# Altium PCB LOC_BUI.pcbdoc
Units mm, origin at the board's own origin, x right, y up, seen from the top; angles counter-clockwise.
Board outline 102.36 x 75.57 mm, 2 copper layers (Top Layer, Bottom Layer); 35 components, 31 nets, 145 pads, 0 vias.
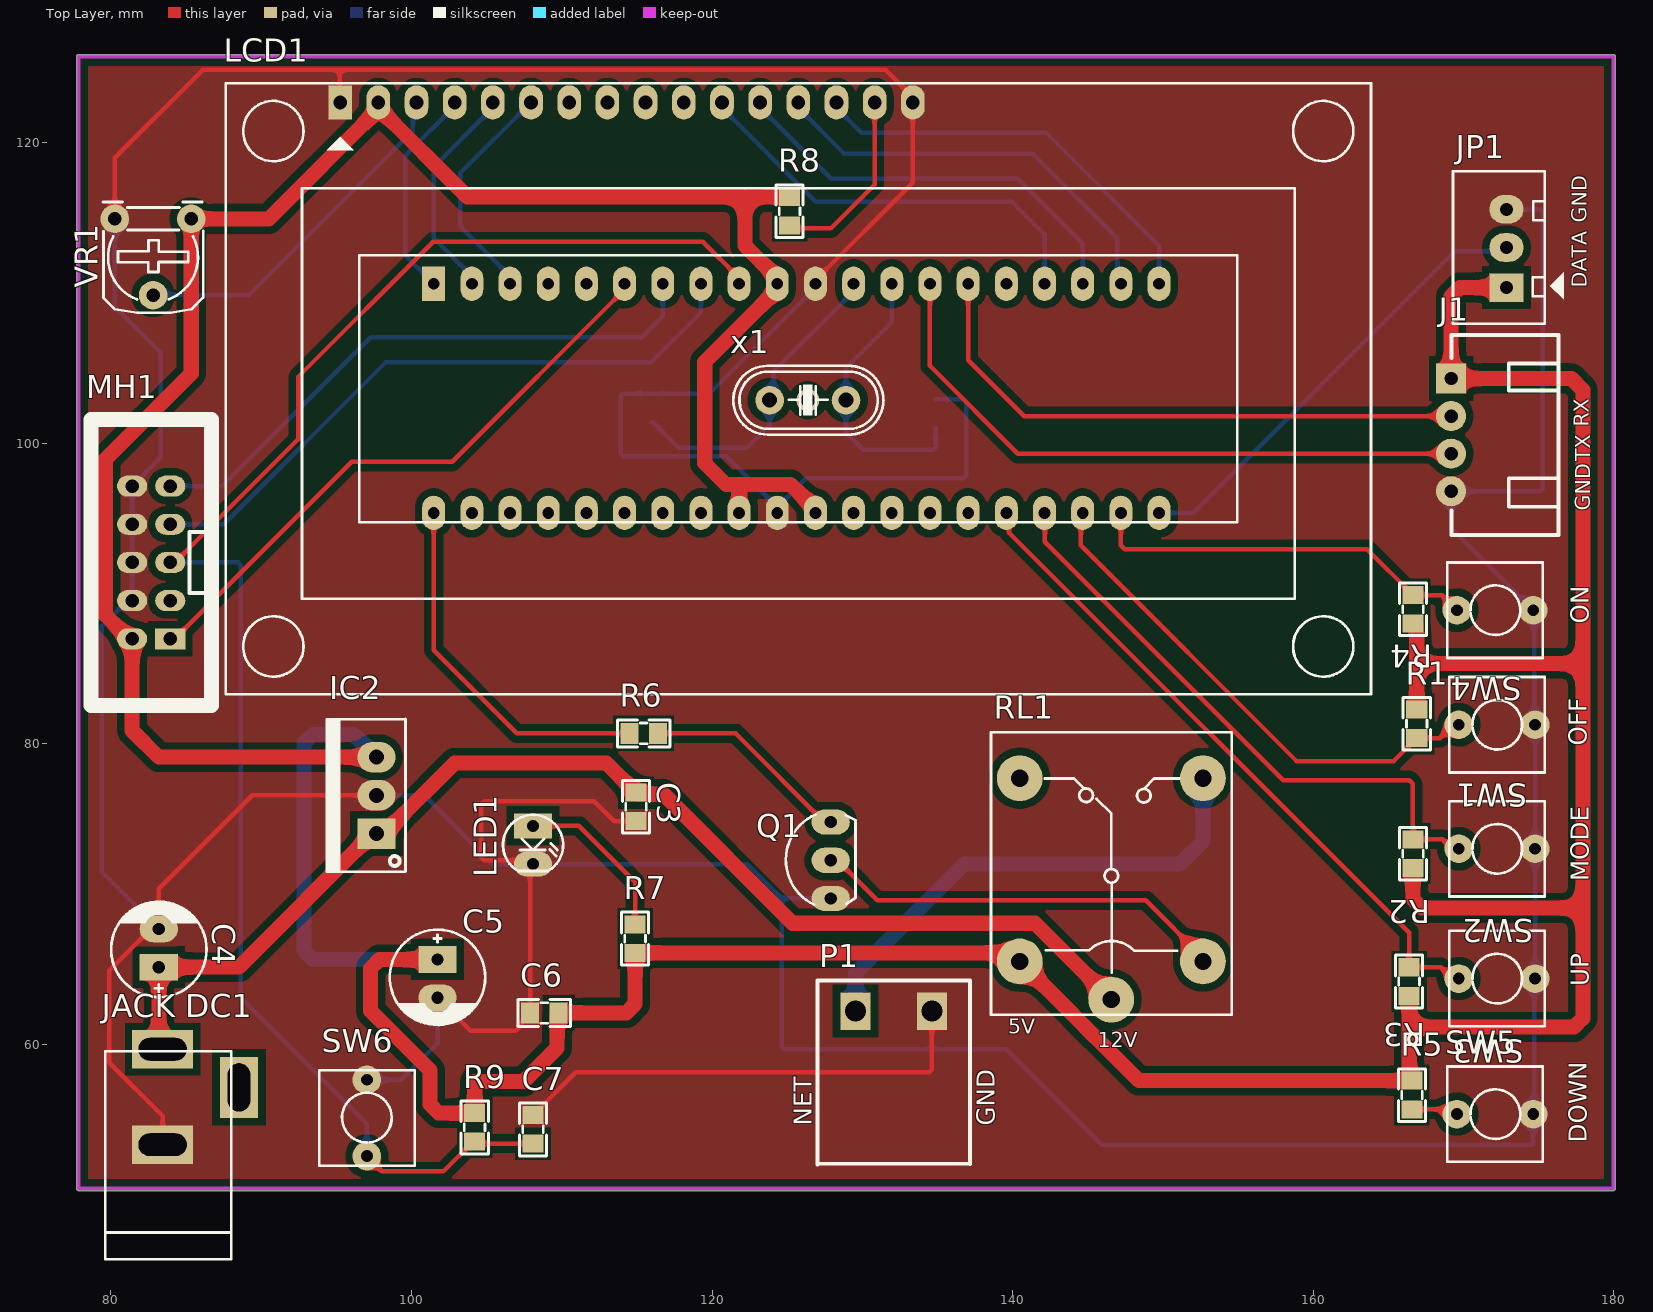
[diagram p0: Top Layer view]
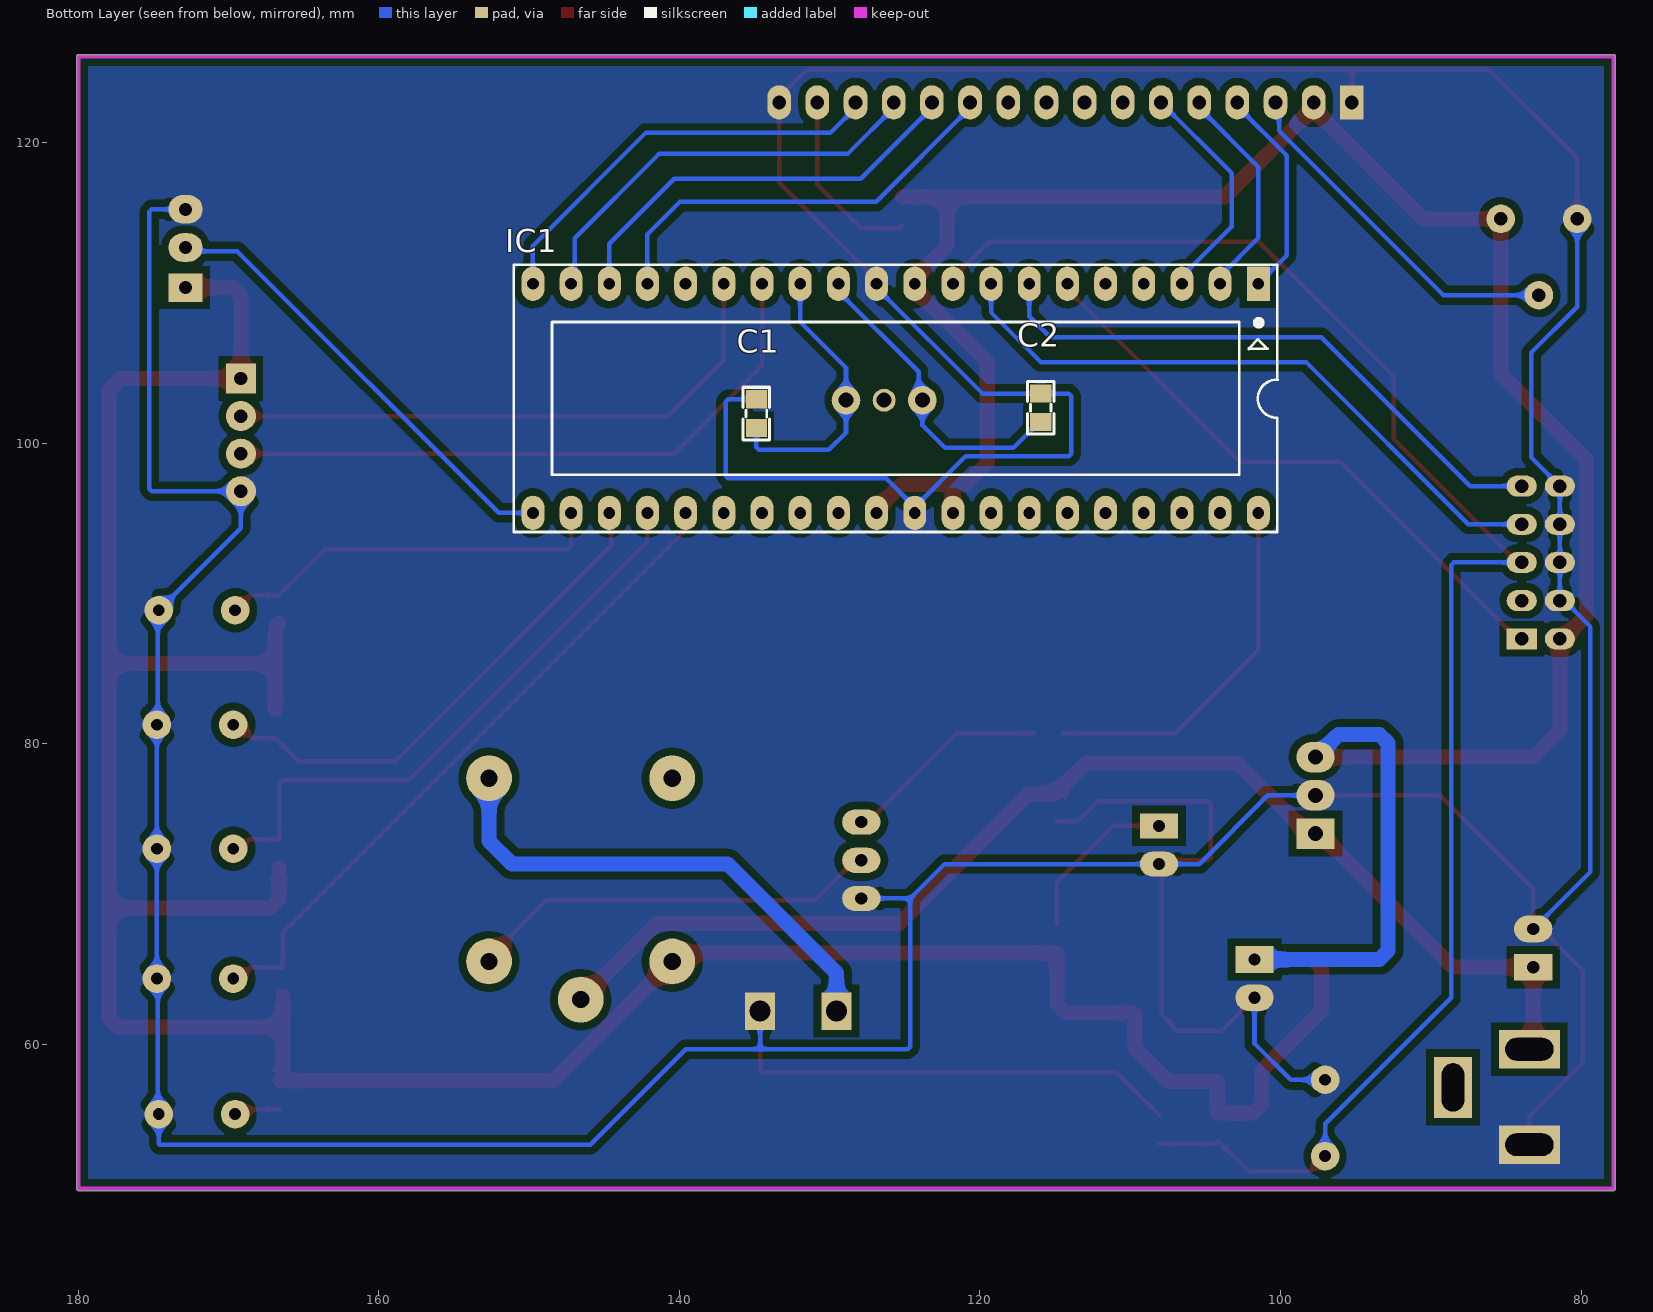
[diagram p1: Bottom Layer view, seen from below]

## Layer stack, top to bottom
Top Solder: solder mask 0.0102, Solder Resist, Dk 3.5
Top Layer: signal copper 0.0356
Dielectric 1: dielectric 0.32, FR-4, Dk 4.8
Bottom Layer: signal copper 0.0356
Bottom Solder: solder mask 0.0102, Solder Resist, Dk 3.5

## Board outline
77.724,50.419 ccw(c77.851,50.419) 77.851,50.292 179.959,50.292 ccw(c179.959,50.419) 180.086,50.419 180.086,125.73 ccw(c179.959,125.73) 179.959,125.857 77.851,125.857 ccw(c77.851,125.73) 77.724,125.73

## Design rules (kind name [scope] priority, off if disabled: settings)
Clearance Clearance_1 [All] p1: gap=0.5 ignorepadtopadclearanceinfootprint=FALSE
Clearance [All] p2 off: gap=0.254 ignorepadtopadclearanceinfootprint=FALSE
PlaneConnect [All] p1: planeconnectstyle=Direct reliefexpansion=0.508 reliefentries=4 reliefconductorwidth=0.254 reliefairgap=0.254
PolygonConnect [All] p1: connectstyle=Direct reliefconductorwidth=0.254 reliefentries=4 polygonreliefangle="90 Angle" airgapwidth=0.254
RoutingVias [All] p1: holewidth=0.4 width=0.6 viastyle="Through Hole" minholewidth=0.4 minwidth=0.6 maxholewidth=0.4 maxwidth=0.6
SolderMaskExpansion [All] p1: expansion=0.102 istentingtop=FALSE
Width [All] p1: maxlimit=1 minlimit=0.3 preferedwidth=0.5
29 further rules are at their usual default settings.

## Components (designator, comment, footprint, x,y, rotation, side; value= is the part's Value field where it differs from the comment)
C1 "221" "tu 0805" 134.874,101.981 r90 bottom
C2 "221" "tu 0805" 115.951,102.362 r90 bottom
C3 "221" "tu 0805" 114.935,75.819 r270 top
C4 "100uF" CP1/2.5 83.185,65.151 r90 top value="47uF/16 - 50V"
C5 "100uF" CP1/2.5 101.727,65.659 r270 top value="47uF/16 - 50V"
C6 "221" "tu 0805" 108.839,62.103 r180 top
C7 "221" "tu 0805" 108.077,54.356 r90 top
IC1 "ATMEL 16A" DIP40/W0.6 101.473,110.617 r0 bottom value="Atmega 16L"
IC2 "LM78XX" QTO-220 97.663,74.041 r90 top value=LM7805
J1 "Header 1_2.54_4P" "Header_Duc Cong_4P 2.54" 169.189,104.289 r0 top
"JACK DC1" "JACK DC 5.5" "JACK DC 5.5" 85.979,56.515 r90 top value="Jac DC"
JP1 "" XH2.54-3P 172.847,110.49 r90 top value="Connector 3"
LCD1 "LCD16x2A" LCD16X2 95.25,122.682 r0 top
LED1 "LED" LED-3 108.077,74.549 r270 top value="LED 3 ly Single Colour"
MH1 "MH PROGRAMER" "CABLE 10" 83.947,86.995 r90 top
P1 "CON_EDG_2P 5.08" "CON 2 2EDG5.08" 134.62,62.23 r180 top
Q1 "C1815" QTO-92 127.889,72.263 r90 top
R1 "1k" "tro smd 0805" 166.817,81.337 r90 top
R2 "1K" "tro smd 0805" 166.685,72.709 r270 top
R3 "1K" "tro smd 0805" 166.431,64.2 r270 top
R4 "1K" "tro smd 0805" 166.685,88.965 r270 top
R5 "1k" "tro smd 0805" 166.497,56.642 r90 top
R6 "1K" "tro smd 0805" 115.443,80.645 r180 top
R7 "1K" "tro smd 0805" 114.935,67.056 r270 top
R8 "1K" "tro smd 0805" 125.095,115.443 r90 top
R9 "1k" "tro smd 0805" 104.14,54.483 r90 top
RL1 "Relay 10A/12V" RL_SPDT_10A 146.558,62.992 r90 top value="Relay SPDT, 10A, 12V"
SW1 "SW" SW2 174.752,81.28 r180 top value="SW chip 2 pin"
SW2 "SW" SW2 174.752,73.025 r180 top value="SW chip 2 pin"
SW3 "SW" SW2 174.752,64.389 r180 top value="SW chip 2 pin"
SW4 "SW" SW2 174.625,88.9 r180 top value="SW chip 2 pin"
SW5 "SW" SW2 174.625,55.372 r180 top value="SW chip 2 pin"
SW6 "SW" SW2 97.028,57.658 r270 top value="SW chip 2 pin"
VR1 "10K" VR 85.344,114.935 r180 top value="VR 10K"
x1 "20MHz" "Thach anh cam" 126.365,102.87 r180 top

## Footprints (in the part's own frame and the unit in brackets; to place one, negate y for a bottom-side part, rotate by r counter-clockwise, add the part's x,y. Pads: shape width x height; smd on the part's side, far side on the other; paste and mask are expansions set on the pad)
"CABLE 10" [mm] "Connector; Header; 5x2 Position"
  rect 1.4x2 hole 0.9: 1(0,0)
  oval 1.4x2 hole 0.9: 2(0,2.54) 3(2.54,0) 4(2.54,2.54) 5(5.08,0) 6(5.08,2.54) 7(7.62,0) 8(7.62,2.54) 9(10.16,0) 10(10.16,2.54)
  silkscreen extent -4.42,-2.73 14.58,5.27, body extent -5.08,-3.3 15.24,5.84, height 9.86
"CON 2 2EDG5.08" [mm]
  rect 2x2.5 hole 1.4: 1(0,0) 2(5.08,0)
  silkscreen extent -2.54,-2.03 7.62,10.21, body extent -2.5,-1.75 7.58,10.25, height 3.15
CP1/2.5 [mil] "Tu hoa 33 >100 uF,50V, 220uF/16V,25V"
  rect 70x100 hole 32: 1(0,0)
  oval 70x100 hole 32: 2(100,0)
  silkscreen extent -78,-125 172,125, body extent -76,-124 172,124, height 422
DIP40/W0.6 [mil] "40 PIN, W 600mil, Pin to pin 100mil"
  rect 60x90 hole 31: 1(0,0)
  oval 60x90 hole 31: 2(100,0) 3(200,0) 4(300,0) 5(400,0) 6(500,0) 7(600,0) 8(700,0) 9(800,0) 10(900,0) 11(1000,0) 12(1100,0) 13(1200,0) 14(1300,0) 15(1400,0) 16(1500,0) 17(1600,0) 18(1700,0) 19(1800,0) 20(1900,0) 21(1900,600) 22(1800,600) 23(1700,600) 24(1600,600) 25(1500,600) 26(1400,600) 27(1300,600) 28(1200,600) 29(1100,600) 30(1000,600) 31(900,600) 32(800,600) 33(700,600) 34(600,600) 35(500,600) 36(400,600) 37(300,600) 38(200,600) 39(100,600) 40(0,600)
  silkscreen extent -50,-50 1950,650, body extent -82,-10 1982,600, height 224
"Header_Duc Cong_4P 2.54" [mil]
  rect 78.74x78.74 hole 35: 1(-1,1)
  round 78.74 hole 35: 2(-1,-97.43) 3(-1,-195.85) 4(-1,-294.28)
  silkscreen extent 0,-409 280,115, body extent 5,-413 278,123, height 290
"JACK DC 5.5" [mm] "Jac DC input"
  rect 2.54x4.064 hole 1.5 slot 3.2 at 90 deg: 1(3.175,2.54) 2(-3.175,2.54)
  rect 4.064x2.54 hole 1.5 slot 3.2 at 0 deg: 3(0.635,-2.54)
  silkscreen extent -10.79,-2.03 3.05,6.35, body extent -10.42,-2.67 3.4,6.84, height 11.02
LCD16X2 [mil] "LCD dipslay 16x2, 16 pin"
  rect 62x90 hole 36: 1(0,0)
  oval 62x90 hole 36: 2(100,0) 3(200,0) 4(300,0) 5(400,0) 6(500,0) 7(600,0) 8(700,0) 9(800,0) 10(900,0) 11(1000,0) 12(1100,0) 13(1200,0) 14(1300,0) 15(1400,0) 16(1500,0)
  oval 0x157.48 all layers, no hole: "Hole 0"(-175,-1425) "Hole 0"(-175,-75) "Hole 0"(2575,-1425) "Hole 0"(2575,-75)
  silkscreen extent -300,-1550 2700,50, body extent -315,-1360 2855,77, height 414
LED-3 [mil] "LED 2 PIN, 3ly Only colour"
  rect 65x100 hole 32: 1(0,0)
  oval 65x100 hole 32: 2(100,0)
  silkscreen extent -29,-78 118,79, body extent -25,-75 113,75, height 217
QTO-92 [mil] "TO-92"
  oval 66x100 hole 32: 1(-100,0) 2(0,0) 3(100,0)
  silkscreen extent -117,-65 120,118, body extent -109,-66 109,95, height 245
QTO-220 [mil] "TO-220 - 1-2-3"
  rect 80x100 hole 39: 1(0,0)
  oval 80x100 hole 39: 2(100,0) 3(200,0)
  silkscreen extent -100,-76 300,130, body extent -119,-64 322,121, height 755
RL_SPDT_10A [mil] "Relay SPDT, 5 pin, 10A,W 650mil, L 800mil, H 800mil"
  round 120 hole 45: 1(0,0) 2(580,240) 3(580,-240) 4(100,-240) 5(100,240)
  silkscreen extent -40,-315 700,315, body extent -46,-304 706,306, height 602
SW2 [mil] "SW button 2pin, 250x 250 mil"
  round 75 hole 31: 1(0,0) 2(200,0)
  silkscreen extent -25,-125 225,125
"Thach anh cam" [mm] "Footpin for Crystal 2 pin"
  round 1.524 hole 1: 0(0,0)
  round 1.905 hole 1: 1(-2.54,0) 2(2.54,0)
  silkscreen extent -5.03,-2.29 4.96,2.29, body extent -5.93,-2.36 5.42,2.29, height 3.5
"tro smd 0805" [mm]
  rect 1.2x1.4 smd: 1(-0.946,-0.061) 2(0.954,-0.061)
  silkscreen extent -1.75,-0.97 1.75,0.84, body extent -1.56,-0.76 1.44,0.64, height 0.53
"tu 0805" [mm] "Compoment SMD 80x50mil"
  rect 1.2x1.4 smd: 1(-0.946,-0.003) 2(0.954,-0.003)
  silkscreen extent -1.75,-0.89 1.75,0.89, body extent -1.01,-0.64 1.01,0.63, height 0.61
VR [mil] "Resistor Variable"
  round 75 hole 35: 1(0,0) 2(100,200) 3(200,0)
  silkscreen extent -31,-44 231,246, body extent -87,-30 307,372, height 165
XH2.54-3P [mil] "CON 3"
  rect 75x90 hole 34: 1(-5,0)
  oval 75x90 hole 34: 2(100,0) 3(200,0)
  silkscreen extent -100,-150 300,140, body extent -95,-90 295,136, height 276

## Part data
C1 C2 C3 C6 C7: library part "Tu 0805 221 50V", "Dán", Chung_Loai=Dán, Don_Vi=Con, Ma_Hang=MH007365, So_Chan=2, Ten_Linh_Kien="Tụ 0805 221-220P 50V"
C4 C5: library part CP2, "C 47uF/50V , 220uF/16V", Description 1="470uF/6,3V - 330uF/10V - 220uF/16V", Description 2="100uF/25V - 35V - 47uF/50V - 22uF/100V", Description 3="33uF => 47uF/63V - 1uF => 4,7uF/160V", Description 4="1uF => 2,2uF/250V - 1uF/350V"
IC1: library part ATmega16A-PU, "8-Bit AVR Microcontroller with 16K Bytes of In-System Programmable Flash Memory"
IC2: "On ap +, from + 5 to + 24VDC"
J1 P1: "Cắm", Chung_Loai=Cắm
  P1: Don_Vi=Con, Ma_Hang=MH000759, Ten_Linh_Kien="CON 2 2EDG5.08-2P 5.08MM ( Xanh Cong)"
JP1: library part "Header 3P Duc Thang", "Connector 3"
LCD1: library part LCD16X2, "JUMP DON CAI"
LED1: "LED Single colour Green and Red"
MH1: library part "MH PRO"
Q1: library part C1815_1, "NPN 600mW, ECB"
R1 R9: library part "Tro 0805 1% 1k", "Dán", Chung_Loai=Dán, Don_Vi=Con, Ma_Hang=MH005468, So_Chan=2, Ten_Linh_Kien="Trở 0805 1% 1k"
R2 R3 R4 R5 R6 R7 R8: library part "Tro 0805 5% 1k", "Dán", Chung_Loai=Dán, Don_Vi=Con, Ma_Hang=MH005234, So_Chan=2, Ten_Linh_Kien="Trở 0805 5% 1k"
RL1: library part "Relay 1", "Relay SPDT,10A - 12VDC 5 Pin"
SW1 SW2 SW3 SW4 SW5 SW6: library part SW2, "Switch button 2 pin"
VR1: library part VR, "Var Resistor"
x1: library part Crystal, "Crystal Oscillator", LatestRevisionDate=17-Jul-2002, LatestRevisionNote="Re-released for DXP Platform.", PackageReference=R38, Published=8-Jun-2000, Publisher="Altium Limited"

## Nets (pads, with @x,y where several pads share a name; then routed paths per layer and width w, separated by ;. In a path a pad name is that pad's centre, name@x,y a point inside that pad or via, vN(x,y) a via of type N, cw(c..) or ccw(c..) an arc to the next point about the centre after c; other vN are vias at no path point)
12V: "JACK DC1.1" C3.1 C4.1 IC2.1 RL1.1 | length 81.1
  Top Layer w1: 83.439,59.69 83.185,59.944 C4.1 88.519,65.151 97.409,74.041 IC2.1 98.179,74.557 98.687,74.557 102.87,78.74 112.956,78.74 C3.1 115.032,76.665 116.756,76.665 125.349,68.072 141.478,68.072 RL1.1
+5: C5.1 C6.1 IC1.10 IC1.30 IC1.32 IC2.3 J1.1 JP1.1 LCD1.2 MH1.2 R1.2 R2.2 R3.2 R4.2 R5.2 R7.2 R8.2 R9.2 RL1.5 VR1.1 | length 361.5
  Top Layer w1: MH1.2@81.215,86.995 79.653,88.557 79.653,98.966 85.344,104.657 VR1.1 90.5,114.935 97.79,122.225 LCD1.2@97.79,122.326 ; MH1.2@81.599,86.995 MH1.2 81.407,80.899 83.185,79.121 IC2.3 ; LCD1.2 LCD1.2@97.79,122.326 ; C5.1 97.868,65.659 97.282,65.073 97.282,62.23 101.219,58.293 101.219,56.023 101.805,55.437 R9.2 104.201,57.537 107.448,57.537 109.685,59.774 109.685,62.006 C6.1 114.288,62.106 114.874,62.692 R7.2 ; R7.2@114.974,66.102 139.338,66.102 RL1.5@139.908,65.532 ; IC1.32 121.793,97.274 ; R8.2 122.174,116.397 ; IC1.30 126.873,95.616 125.215,97.274 121.793,97.274 ; RL1.5@140.208,65.786 144.034,61.96 144.034,61.947 145.513,60.468 145.526,60.468 148.398,57.596 R5.2@166.47,57.596 ; R3.2 166.37,61.167 ; R5.2 R5.2@166.47,57.596 ; R2.2 166.624,69.674 167.21,69.088 177.927,69.088 ; R4.2 166.724,88.011 166.824,87.911 166.824,87.379 166.878,87.325 166.878,85.344 ; R1.2 166.878,85.344 ; JP1.1 169.75,110.363 169.164,109.777 J1.1 177.167,104.314 177.927,103.554 177.927,85.344 ; LCD1.2@97.79,122.326 103.719,116.397 122.174,116.397 ; 121.793,97.274 120.912,97.274 119.507,98.679 119.507,105.41 124.333,110.236 IC1.10 124.333,110.998 122.174,113.157 122.174,116.397 ; 166.37,61.167 177.341,61.167 177.927,61.753 177.927,69.088 ; 166.37,61.167 166.37,57.696 R5.2@166.47,57.596 ; 166.878,85.344 177.927,85.344 ; 177.927,69.088 177.927,85.344
  Bottom Layer w1: IC2.3 96.139,80.645 93.423,80.645 92.837,80.059 92.837,66.245 93.423,65.659 C5.1
D4: IC1.17 LCD1.11 | length 28.6
  Bottom Layer w0.3: LCD1.11 120.65,122.326 126.898,116.078 139.954,116.078 142.113,113.919 IC1.17
D5: IC1.18 LCD1.12 | length 28.2
  Bottom Layer w0.3: LCD1.12 123.19,122.326 127.914,117.602 140.335,117.602 144.653,113.284 IC1.18
D6: IC1.19 LCD1.13 | length 28.3
  Bottom Layer w0.3: LCD1.13 125.73,122.326 128.803,119.253 141.351,119.253 146.959,113.645 146.959,110.851 IC1.19
D7: IC1.20 LCD1.14 | length 28.2
  Bottom Layer w0.3: LCD1.14 128.27,122.326 129.946,120.65 142.24,120.65 149.733,113.157 IC1.20
DATA: IC1.21 JP1.2 | length 30.4
  Bottom Layer w0.3: IC1.21 152.019,95.377 169.418,112.776 172.593,112.776 JP1.2
EN: IC1.3 LCD1.6 | length 15.4
  Bottom Layer w0.3: IC1.3 106.553,111.125 103.251,114.427 103.251,117.983 LCD1.6
GND: "JACK DC1.2" C1.2 C2.2 C3.2 C4.2 C5.2 C6.2 C7.2 IC1.11 IC1.31 IC2.2 J1.4 JP1.3 LCD1.1 LCD1.16 LED1.2 MH1.4 MH1.6 MH1.8 MH1.10 P1.1 Q1.1 SW1.1 SW2.1 SW3.1 SW4.1 SW5.1 SW6.1 VR1.3 | length 466.7
  Top Layer w0.3: VR1.3 80.264,118.999 86.106,124.841 95.214,124.841 ; 83.439,53.34 83.439,55.245 79.883,58.801 79.883,64.927 82.647,67.691 C4.2 83.185,70.358 89.408,76.581 IC2.2 ; LCD1.1 95.214,122.718 95.214,124.841 ; C5.2 103.94,60.906 106.936,60.906 107.135,61.105 107.135,61.256 107.885,62.006 107.885,71.817 LED1.2 107.818,72.268 104.824,72.268 104.648,72.443 104.648,76.024 104.824,76.2 112.141,76.2 113.476,74.865 C3.2 ; C7.2 110.936,58.166 134.444,58.166 134.62,58.342 P1.1 ; IC1.11 126.873,110.871 133.35,117.348 LCD1.16 133.35,123.038 131.547,124.841 95.214,124.841
  Bottom Layer w0.3: VR1.3 80.264,109.093 83.312,106.045 83.312,99.06 MH1.10 MH1.8 MH1.6 MH1.4 81.107,89.535 79.375,87.803 79.375,71.501 C4.2 ; SW6.1 99.317,57.658 101.727,60.068 C5.2 ; IC2.2 100.838,76.581 105.41,72.009 LED1.2 122.35,72.009 124.636,69.723 ; IC1.31 IC1.31@124.333,95.758 ; IC1.11 126.873,110.363 119.826,103.316 C2.2 114.095,103.316 113.919,103.141 113.919,99.317 114.095,99.141 120.95,99.141 IC1.31@124.333,95.758 ; Q1.1 124.636,69.723 ; P1.1 134.62,59.69 ; C1.2 136.73,102.935 136.906,102.76 136.906,97.839 136.73,97.663 126.238,97.663 IC1.31@124.333,95.758 ; JP1.3 175.084,115.57 175.26,115.394 175.26,96.99 175.084,96.814 J1.4 169.164,94.361 SW4.1 174.689,88.837 174.689,81.343 SW1.1 SW2.1 SW3.1 174.689,64.325 174.689,55.435 SW5.1 174.625,53.41 174.555,53.34 145.923,53.34 139.573,59.69 134.62,59.69 ; 124.636,69.723 124.636,59.866 124.811,59.69 134.62,59.69
"ion am": IC1.40 R6.2 | length 24.4
  Top Layer w0.3: IC1.40 101.473,86.233 107,80.706 R6.2
MISO: IC1.7 MH1.9 | length 39.6
  Bottom Layer w0.3: MH1.9 87.376,97.155 97.282,107.061 115.316,107.061 116.713,108.458 IC1.7
MOSI: IC1.6 MH1.1 | length 40.2
  Top Layer w0.3: MH1.1 84.247,86.995 96.025,98.773 102.71,98.773 114.173,110.236 IC1.6
NetC1_1: C1.1 IC1.13 x1.1 | length 19
  Bottom Layer w0.3: IC1.13 131.953,108.077 128.905,105.029 x1.1 128.905,100.711 130.048,99.568 134.695,99.568 134.871,99.744 C1.1
NetC2_1: C2.1 IC1.12 x1.2 | length 20.9
  Bottom Layer w0.3: C2.1 116.048,101.416 117.769,99.695 122.301,99.695 123.825,101.219 x1.2 ; x1.2 124.072,103.118 124.072,104.768 129.413,110.109 IC1.12
NetLCD1_3: LCD1.3 VR1.2 | length 23.8
  Bottom Layer w0.3: VR1.2 89.154,109.855 100.086,120.787 100.086,122.438 LCD1.3
NetLCD1_15: LCD1.15 R8.1 | length 12.4
  Top Layer w0.3: R8.1 125.353,114.3 127.889,114.3 130.81,117.221 LCD1.15
NetLED1_1: LED1.1 R7.1 | length 11.1
  Top Layer w0.3: LED1.1 111.125,74.549 114.874,70.8 R7.1
NetP1_2: P1.2 RL1.3 | length 33.5
  Bottom Layer w1: P1.2 129.54,64.77 136.779,72.009 151.13,72.009 152.654,73.533 RL1.3
NetQ1_2: Q1.2 RL1.4 | length 27.7
  Top Layer w0.3: Q1.2 128.321,72.263 130.988,69.596 148.844,69.596 152.654,65.786 RL1.4
NetQ1_3: Q1.3 R6.1 | length 13.9
  Top Layer w0.3: R6.1 121.554,80.706 127.457,74.803 Q1.3
nut1: IC1.23 R1.1 SW1.2 | length 34.4
  Top Layer w0.3: IC1.23 144.526,95.377 144.526,93.218 158.877,78.867 165.354,78.867 R1.1 168.402,80.391 169.291,81.28 SW1.2
nut2: IC1.24 R2.1 SW2.2 | length 40.1
  Top Layer w0.3: IC1.24 142.133,95.357 142.133,93.452 157.988,77.597 166.37,77.597 166.624,77.343 R2.1 168.608,73.655 169.238,73.025 SW2.2
nut3: IC1.25 R3.1 SW3.2 | length 44.9
  Top Layer w0.3: IC1.25 139.749,95.201 139.749,94.058 166.37,67.437 R3.1 168.481,65.146 169.238,64.389 SW3.2
nut4: IC1.22 R4.1 SW4.2 | length 26.3
  Top Layer w0.3: IC1.22 147.193,93.218 147.447,92.964 163.571,92.964 R4.1 168.534,89.911 SW4.2
nut5: R5.1 SW5.2 | length 3.1
  Top Layer w0.3: R5.1 168.786,55.696 169.111,55.372 SW5.2
RESET: C7.1 IC1.9 MH1.5 R9.1 SW6.2 | length 110.4
  Top Layer w0.3: MH1.5 84.247,92.075 92.45,100.278 92.45,104.418 101.443,113.411 119.38,113.411 121.793,110.998 IC1.9 ; SW6.2 98.044,51.562 102.125,51.562 104.101,53.537 R9.1 104.328,53.41 C7.1
  Bottom Layer w0.3: MH1.5 88.47,92.075 88.646,91.899 88.646,63.119 97.028,54.737 SW6.2
RS: IC1.1 LCD1.4 | length 14.2
  Bottom Layer w0.3: IC1.1 99.568,112.522 99.568,119.138 102.87,122.44 LCD1.4
RW: IC1.2 LCD1.5 | length 14.7
  Bottom Layer w0.3: IC1.2 104.013,111.125 101.473,113.665 101.473,118.389 105.41,122.326 LCD1.5
RX: IC1.15 J1.2 | length 38.8
  Top Layer w0.3: IC1.15 137.033,105.537 140.756,101.814 J1.2
SCK: IC1.8 MH1.7 | length 43.1
  Bottom Layer w0.3: MH1.7 87.503,94.615 98.298,105.41 115.951,105.41 119.253,108.712 IC1.8
TX: IC1.14 J1.3 | length 42.6
  Top Layer w0.3: IC1.14 134.493,105.156 140.335,99.314 J1.3
pads on no net: "JACK DC1.3" "LCD1.Hole 0" IC1.4 IC1.5 IC1.16 IC1.26 IC1.27 IC1.28 IC1.29 IC1.33 IC1.34 IC1.35 IC1.36 IC1.37 IC1.38 IC1.39 LCD1.7 LCD1.8 LCD1.9 LCD1.10 MH1.3 RL1.2 x1.0

## Polygon pours and split planes (outlines as drawn)
GND on Bottom Layer "GND_L02_P000" (solid, remove dead copper, pour order 0): 179.959,50.419 77.851,50.419 77.851,125.73 179.959,125.73
GND on Top Layer "GND_L01_P001" (solid, remove dead copper, pour order 1): 179.959,50.419 77.851,50.419 77.851,125.73 179.959,125.73

## Keep-outs
Keep-Out Layer:
  lines w0.254: 77.851,50.419 77.851,125.73 179.959,125.73 179.959,50.419 77.851,50.419

## Silkscreen, mask and mechanical layers (free items; w line width, h text height)
Top Overlay:
  text "GND" at 178.181,114.681 h1 r90
  text "DATA" at 178.181,110.363 h1 r90
  text "RX" at 178.308,101.092 h1 r90
  text "TX" at 178.435,98.806 h1 r90
  text "GND" at 178.435,95.504 h1 r90
  text "ON" at 178.308,88.011 h1.2 r90
  text "OFF" at 178.181,79.883 h1.2 r90
  text "MODE" at 178.308,70.866 h1.2 r90
  text "UP" at 178.308,63.881 h1.2 r90
  text "5V" at 139.7,60.706 h1
  text "12V" at 145.669,59.817 h1
  text "NET" at 126.619,54.61 h1.2 r90
  text "GND" at 138.811,54.61 h1.2 r90
  text "DOWN" at 178.181,53.467 h1.2 r90